# Altium PCB Game_Consol.PcbDoc
Units mil, origin at the board's own origin, x right, y up, seen from the top; angles counter-clockwise.
Board outline 3090.55 x 1732.28 mil, 2 copper layers (Top Layer, Bottom Layer); 55 components, 43 nets, 220 pads, 0 vias.
Unrouted connection lines stored in the file: 145.
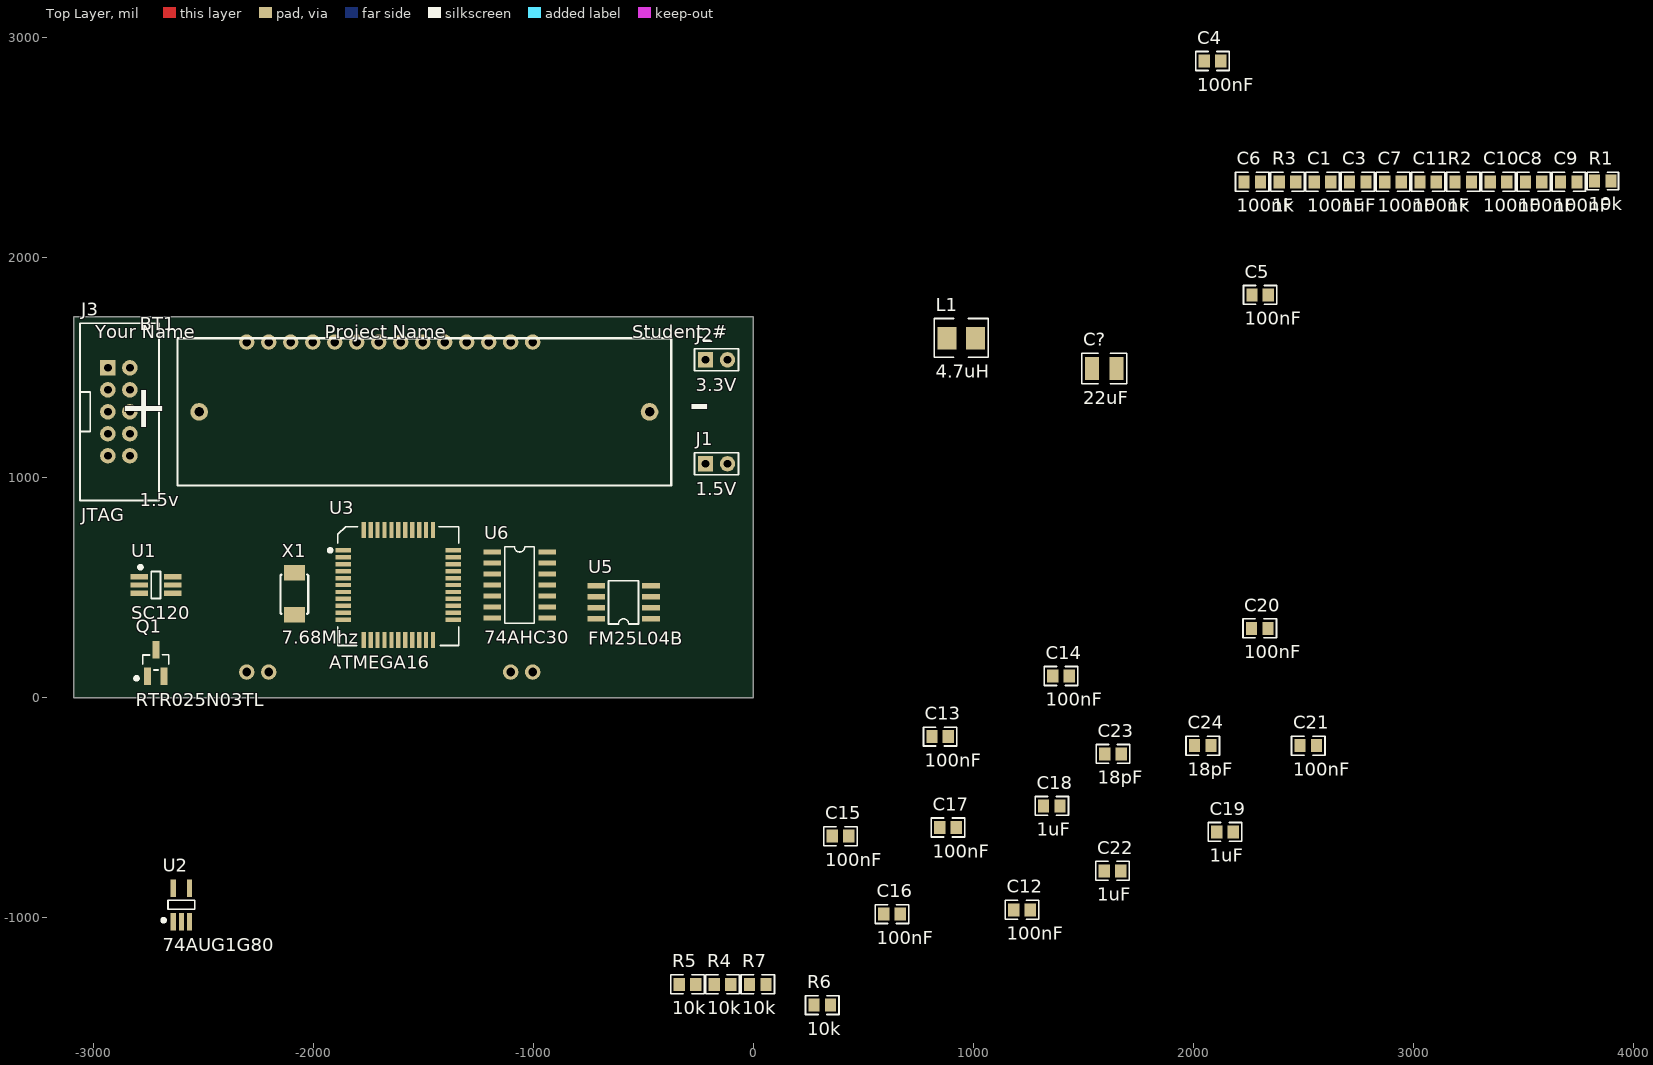
[diagram p0: Top Layer view]
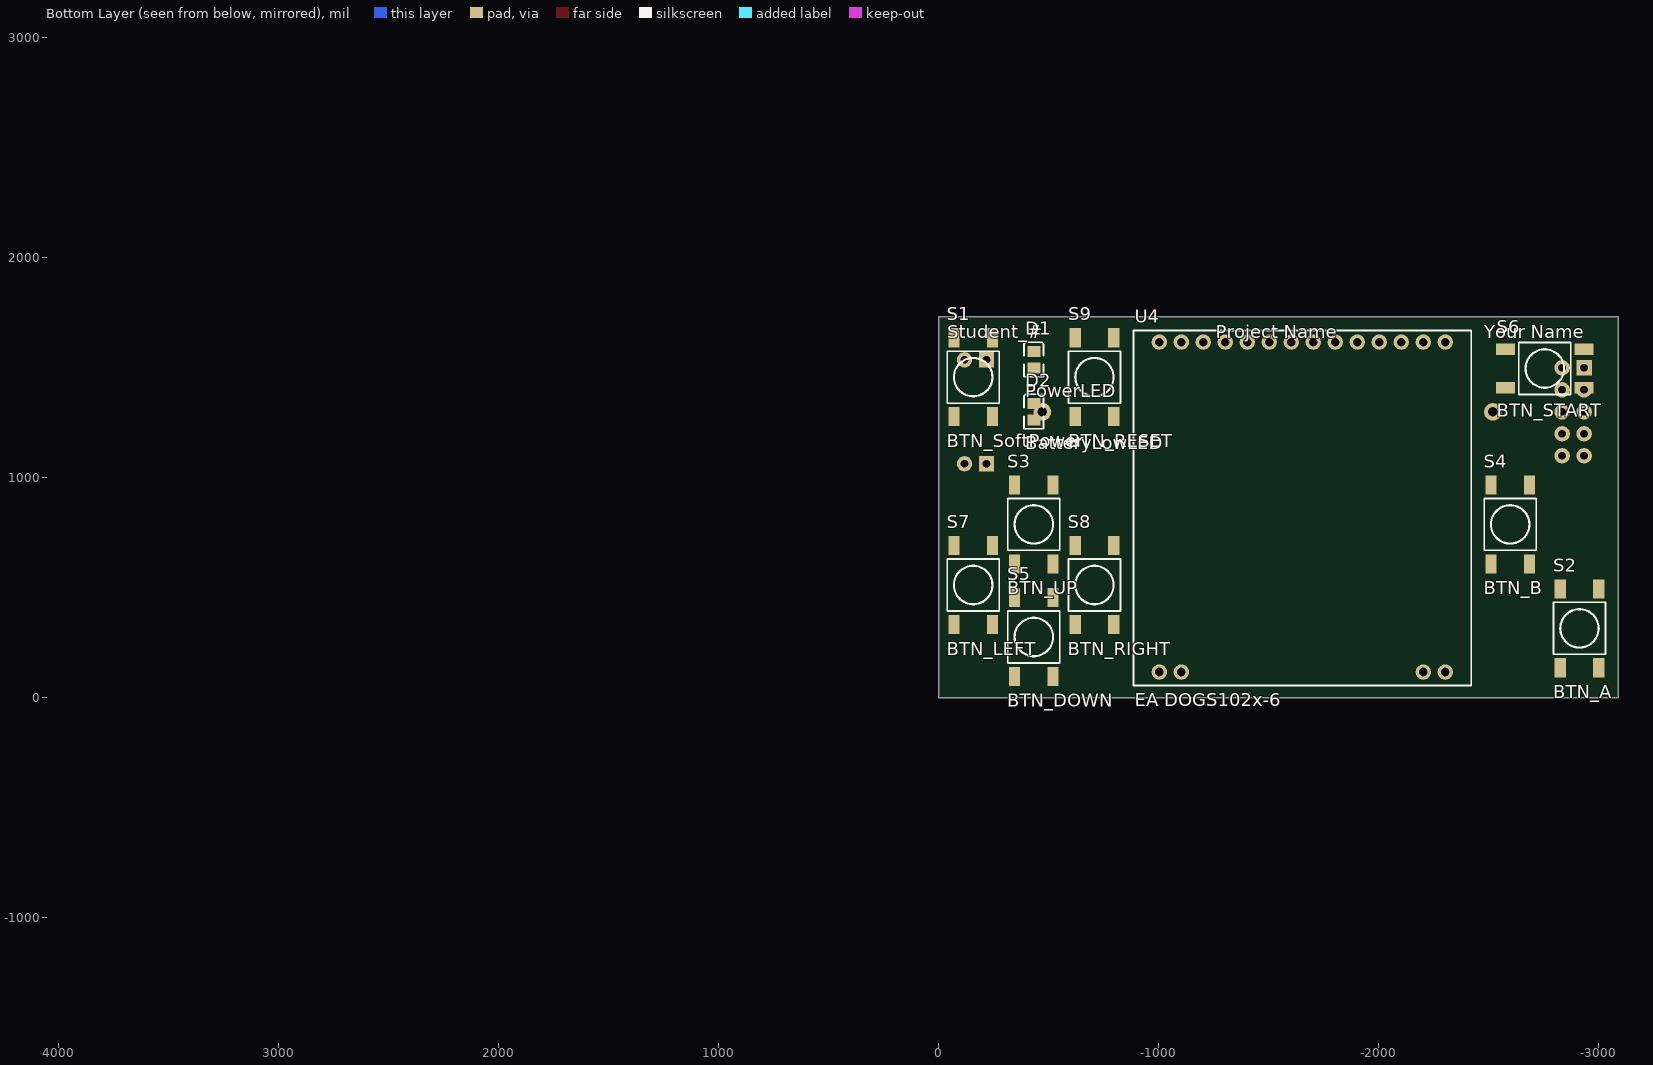
[diagram p1: Bottom Layer view, seen from below]

## Layer stack, top to bottom
Top Solder: solder mask 0.4, Solder Resist, Dk 3.5
Top Layer: signal copper 1.4
Dielectric1: dielectric 12.6, FR-4, Dk 4.8
Bottom Layer: signal copper 1.4
Bottom Solder: solder mask 0.4, Solder Resist, Dk 3.5

## Board outline
-3090.55,0 -3090.55,1732.28 0,1732.28 0,0

## Design rules (kind name [scope] priority, off if disabled: settings)
Clearance [All] p1: gap=10
ComponentClearance [All] p1 off: gap=10 collisioncheckmode=3 verticalgap=10 showdistances=FALSE
DiffPairsRouting [All] p1: maxlimit=20 minlimit=10 mostfreqgap=10 toplayer_minwidth=15 toplayer_maxwidth=15 toplayer_prefwidth=15 bottomlayer_minwidth=15 bottomlayer_maxwidth=15 bottomlayer_prefwidth=15 maxuncoupledlength=500
FabricationTestPointUsage TestPointUsage [All] p1: valid=0 allowmultiple=FALSE
FabricationTestpoint Testpoint [All] p1: side=3 testpointundercomponent=TRUE minsize=40 maxsize=100 preferedsize=60 minholesize=0 maxholesize=40 preferedholesize=32 testpointgrid=1 allowsidetop=TRUE allowsidebottom=TRUE usegrid=TRUE gridtolerance=0.01
Height [All] p1: minheight=0 maxheight=7874.02 prefheight=500
HoleSize [All] p1: absolutevalues=TRUE maxlimit=199 minlimit=15 maxpercent=80.000 minpercent=20.000
MinimumAnnularRing [All] p1: minimumring=5
PolygonConnect [All] p1: connectstyle=Relief reliefconductorwidth=10 reliefentries=4 polygonreliefangle="90 Angle" airgapwidth=10
RoutingVias [All] p1: holewidth=20 width=40 viastyle="Through Hole" minholewidth=15 minwidth=25 maxholewidth=80 maxwidth=100
SilkToSolderMaskClearance SilkscreenOverComponentPads [IsPad] p1: minsilkscreentomaskgap=10 clearancetoexposedcopper=TRUE
SolderMaskExpansion [All] p1: expansion=6
Width [All] p1: maxlimit=1000 minlimit=6 preferedwidth=10 minimp=50.000000 maximp=50.000000 favimp=50.000000
23 further rules are at their usual default settings.

## Classes and differential pairs
component class Game_Consol_Power: BT1 C1 C3 C4 C5 C6 C7 C8 C9 C10 C11 C? D1 D2 J1 J2 L1 R1 R2 R3 S1 U1 U2
component class Game_Consol_Top: C12 C13 C14 C15 C16 C17 C18 C19 C20 C21 C22 C23 C24 J3 Q1 R4 R5 R6 R7 S2 S3 S4 S5 S6 S7 S8 S9 U3 U4 U5 U6 X1

## Components (designator, comment, footprint, x,y, rotation, side; value= is the part's Value field where it differs from the comment)
BT1 "1.5v" BATT_HOLDER -1496.06,1299.21 r180 top
C1 "100nF" 0805 2587.09,2344.64 r0 top
C3 "1uF" 0805 2746.97,2344.64 r0 top
C4 "100nF" 0805 2086.61,2893.7 r0 top
C5 "100nF" 0805 2303.15,1830.71 r0 top
C6 "100nF" 0805 2267.34,2344.64 r0 top
C7 "100nF" 0805 2906.84,2344.64 r0 top
C8 "100nF" 0805 3546.34,2344.64 r0 top
C9 "100nF" 0805 3706.21,2344.64 r0 top
C10 "100nF" 0805 3386.46,2344.64 r0 top
C11 "100nF" 0805 3066.71,2344.64 r0 top
C12 "100nF" 0805 1220.47,-964.57 r0 top
C13 "100nF" 0805 848.43,-177.17 r0 top
C14 "100nF" 0805 1397.64,98.43 r0 top
C15 "100nF" 0805 395.67,-629.92 r0 top
C16 "100nF" 0805 629.92,-984.25 r0 top
C17 "100nF" 0805 883.86,-590.55 r0 top
C18 "1uF" 0805 1356.3,-492.13 r0 top
C19 "1uF" 0805 2143.7,-610.24 r0 top
C20 "100nF" 0805 2301.18,314.96 r0 top
C21 "100nF" 0805 2522.1,-218.65 r0 top
C22 "1uF" 0805 1631.89,-787.4 r0 top
C23 "18pF" 0805 1633.86,-255.91 r0 top
C24 "18pF" 0805 2042.48,-218.65 r0 top
C? "22uF" 1210 1594.49,1496.06 r0 top
D1 "PowerLED" 0805D -433.07,1535.43 r270 bottom
D2 "BatteryLowLED" 0805D -433.07,1299.21 r270 bottom
J1 "1.5V" HDR1X2 -218.11,1062.99 r0 top
J2 "3.3V" HDR1X2 -218.11,1535.43 r0 top
J3 "JTAG" BOXEDVERT10 -2934.65,1499.21 r270 top
L1 "4.7uH" 1210L 944.88,1633.86 r0 top
Q1 "RTR025N03TL" SOT23 -2716.54,157.48 r90 top
R1 "10k" 0805 3860.95,2348.27 r0 top
R2 "1k" 0805 3226.59,2344.64 r0 top
R3 "1k" 0805 2427.22,2344.64 r0 top
R4 "10k" 0805 -140.34,-1303.02 r0 top
R5 "10k" 0805 -300.22,-1303.02 r0 top
R6 "10k" 0805 312.99,-1397.64 r0 top
R7 "10k" 0805 19.53,-1303.02 r0 top
S1 "BTN_SoftPower" SPNO_SMD -157.48,1456.69 r270 bottom
S2 "BTN_A" SPNO_SMD -2913.39,314.96 r90 bottom
S3 "BTN_UP" SPNO_SMD -433.07,787.4 r90 bottom
S4 "BTN_B" SPNO_SMD -2598.43,787.4 r270 bottom
S5 "BTN_DOWN" SPNO_SMD -433.07,275.59 r270 bottom
S6 "BTN_START" SPNO_SMD -2755.91,1496.06 r0 bottom
S7 "BTN_LEFT" SPNO_SMD -157.48,511.81 r270 bottom
S8 "BTN_RIGHT" SPNO_SMD -708.66,511.81 r270 bottom
S9 "BTN_RESET" SPNO_SMD -708.66,1456.69 r270 bottom
U1 "SC120" SOT23-6 -2716.54,511.81 r0 top
U2 "74AUG1G80" SOT23-5 -2600.39,-942.07 r90 top
U3 "ATMEGA16" QFP-48 -1614.17,511.81 r0 top
U4 "EA DOGS102x-6" "EA DOGS102x" -1653.54,866.14 r180 bottom
U5 "FM25L04B" SOIC-8 -590.55,433.07 r180 top
U6 "74AHC30" SOIC-14 -1062.99,511.81 r0 top
X1 "7.68Mhz" XTAL_FLAT_SMD -2086.61,472.44 r90 top

## Footprints (in the part's own frame and the unit in brackets; to place one, negate y for a bottom-side part, rotate by r counter-clockwise, add the part's x,y. Pads: shape width x height; smd on the part's side, far side on the other; paste and mask are expansions set on the pad)
0805 [mm] "0805 Footprint"
  rect 1.3x1.5 smd: 1(-0.95,0) 2(0.95,0)
  silkscreen extent -1.93,-1.09 1.93,1.09, body extent -1.03,-0.64 0.97,0.61, height 0.8
0805D [mm] "0805 Diode"
  rect 1.3x1.5 smd: A(0.95,0) K(-0.95,0)
  silkscreen extent -2.03,-1.14 1.95,1.12, body extent -1.01,-0.62 1.01,0.63, height 1.1
1210 [mm]
  rect 1.6x2.7 smd: 1(-1.4,0) 2(1.4,0)
  silkscreen extent -2.6,-1.75 2.6,1.75, body extent -2,-1.24 2,1.24, height 1.72
1210L [mm] "Precision Wire Wound Inductor, 2-Leads, Body 3.2x3.2mm, IPC Low Density"
  rect 2.2x2.6 smd: 1(-1.651,0) 2(1.651,0)
  silkscreen extent -3.12,-2.21 3.1,2.26, body extent -1.75,-1.75 1.75,1.75, height 2.2
BATT_HOLDER [mil]
  round 80 hole 43.31: 1(1023.62,0) 2(-1023.62,0)
  silkscreen extent -1122,-335 1122,335
BOXEDVERT10 [mil] "IDC Header 2.54mm Boxed 10 pins"
  rect 70x70 hole 35.43: 1(0,0)
  round 70 hole 35.43: 2(0,100) 3(100,0) 4(100,100) 5(200,0) 6(200,100) 7(300,0) 8(300,100) 9(400,0) 10(400,100)
  silkscreen extent -203,-127 603,232, body extent -204,-129 604,237, height 359
"EA DOGS102x" [mil] "graphics display footprint"
  round 70 hole 39.37: 1(-650,-750) 2(-550,-750) 13(550,-750) 14(650,-750) 15(650,750) 16(550,750) 17(450,750) 18(350,750) 19(250,750) 20(150,750) 21(50,750) 22(-50,750) 23(-150,750) 24(-250,750) 25(-350,750) 26(-450,750) 27(-550,750) 28(-650,750)
  silkscreen extent -768,-811 768,803, body extent -768,-807 768,807, height 213
HDR1X2 [mil] "Connector; Header; 2 Position"
  rect 70x70 hole 35.43: 1(0,0)
  round 70 hole 35.43: 2(100,0)
  silkscreen extent -50,-50 150,50, body extent -50,-50 150,50, height 333
QFP-48 [mm]
  rect 1.8x0.5 smd: 1(-6.35,4) 2(-6.35,3.2) 3(-6.35,2.4) 4(-6.35,1.6) 5(-6.35,0.8) 6(-6.35,0) 7(-6.35,-0.8) 8(-6.35,-1.6) 9(-6.35,-2.4) 10(-6.35,-3.2) 11(-6.35,-4) 23(6.35,-4) 24(6.35,-3.2) 25(6.35,-2.4) 26(6.35,-1.6) 27(6.35,-0.8) 28(6.35,0) 29(6.35,0.8) 30(6.35,1.6) 31(6.35,2.4) 32(6.35,3.2) 33(6.35,4)
  rect 0.5x1.8 smd: 12(-4,-6.35) 13(-3.2,-6.35) 14(-2.4,-6.35) 15(-1.6,-6.35) 16(-0.8,-6.35) 17(0,-6.35) 18(0.8,-6.35) 19(1.6,-6.35) 20(2.4,-6.35) 21(3.2,-6.35) 22(4,-6.35) 34(4,6.35) 35(3.2,6.35) 36(2.4,6.35) 37(1.6,6.35) 38(0.8,6.35) 39(0,6.35) 40(-0.8,6.35) 41(-1.6,6.35) 42(-2.4,6.35) 43(-3.2,6.35) 44(-4,6.35)
  silkscreen extent -8,-6.98 6.98,6.73, body extent -5.97,-6 6.03,6, height 1.13
SOIC-8 [mil] "SOIC-8 Footprint"
  rect 80x24 smd: 1(-125,75) 2(-125,25) 3(-125,-25) 4(-125,-75) 5(125,-75) 6(125,-25) 7(125,25) 8(125,75)
  silkscreen extent -68,-98 68,98, body extent -117,-98 119,94, height 67
SOIC-14 [mil] "SOIC-14 Footprint"
  rect 80x24 smd: 1(-125,150) 2(-125,100) 3(-125,50) 4(-125,0) 5(-125,-50) 6(-125,-100) 7(-125,-150)
  rect 80x24.02 smd: 8(125,-150) 9(125,-100) 10(125,-50) 11(125,0) 12(125,50) 13(125,100) 14(125,150)
  silkscreen extent -67,-173 66,173, body extent -118,-170 118,170, height 61
SOT23 [mil] "SOT23, 3-Leads, Body 3.0x2.5mm (max), Pitch 0.95mm, IPC Low Density"
  rect 80.24x31.5 smd: 1(-60,37.4)
  rect 80x31.5 smd: 2(-60,-37.4) 3(60,0)
  silkscreen extent -75,-59 37,93, body extent -52,-59 52,59, height 43
SOT23-5 [mm]
  rect 2.032x0.6 smd: 1(-1.929,0.95) 2(-1.929,0) 3(-1.929,-0.95) 4(1.929,-0.95) 5(1.929,0.95)
  silkscreen extent -1.9,-1.55 0.53,2.18, body extent -1.17,-1.46 1.17,1.46, height 1.02
SOT23-6 [mm]
  rect 2.032x0.6 smd: 1(-1.929,0.95) 2(-1.929,0) 3(-1.929,-0.95) 4(1.929,-0.95) 5(1.929,0) 6(1.929,0.95)
  silkscreen extent -1.9,-1.55 0.53,2.18, body extent -1.5,-1.56 1.5,1.49, height 1.42
SPNO_SMD [mm] "SP NO SMD Tactile switch"
  rect 2.2x1.3 smd: 1(-4.55,-2.225) 2(4.55,-2.225) 3(-4.55,2.225) 4(4.55,2.225)
  silkscreen extent -3,-3 3,3, body extent -4.25,-3.3 4.25,3.3, height 4.32
XTAL_FLAT_SMD [mm]
  rect 1.8x2.4 smd: 1(-2.412,0) 2(2.413,0)
  silkscreen extent -2.33,-1.59 2.21,1.6, body extent -2.58,-1.6 2.42,1.6, height 1.02

## Part data
BT1: library part BAT, "Battery Holder AA 1.5v"
C1 C3 C4 C5 C6 C7 C8 C9 C10 C11 C12 C13 C14 C15 C16 C17 C18 C19 C20 C21 C22 C23 C24: library part "C 0805", "Capacitor 100nF"
C?: library part "C 1210", "Capacitor 22uF"
D1: library part "LED GREEN", "Light Emitting Diode"
D2: library part "LED RED", "Light Emitting Diode"
J1 J2: library part HDR2, "2 Pin Header"
J3: library part JTAG_CON, "JTAG ATMEL connector"
L1: library part "I 1210", "Inductor 4.7uH"
Q1: library part MOSFET-N, "N-Channel MOSFET"
R1 R2 R3 R4 R5 R6 R7: library part R, "Resistor"
S1 S2 S3 S4 S5 S6 S7 S8 S9: library part SW-PB, "Push Button Switch"
U1: "Regulator Low Voltage"
U2: "Inverted single D flip flop"
U3: "ATMEGA16 Microcontroller"
U4: "LCD 102x64-pixel with backlight"
U5: "FRAM 4Kb Memory"
U6: "1 x 8 Input NAND gate"
X1: library part XTAL, "Crystal Oscillator"

## Nets (pads, with @x,y where several pads share a name; then routed paths per layer and width w, separated by ;. In a path a pad name is that pad's centre, name@x,y a point inside that pad or via, vN(x,y) a via of type N, cw(c..) or ccw(c..) an arc to the next point about the centre after c; other vN are vias at no path point)
BATTERYLOWLED: D2.K U3.40
BTN_A: C12.1 S2.3 U3.26 U6.1
BTN_B: C14.1 S4.3 U3.20 U6.2
BTN_DOWN: C15.1 S5.3 U3.32 U6.4
BTN_LEFT: C17.1 S7.3 U3.31 U6.5
BTN_RESET: C21.1 R4.1 S9.3 U3.4
BTN_RIGHT: C20.1 S8.3 U3.30 U6.6
BTN_START: C16.1 S6.3 U3.16 U6.11 U6.12
BTN_UP: C13.1 S3.3 U3.33 U6.3
GND: BT1.2 C1.2 C3.1 C4.2 C5.1 C6.1 C7.1 C8.1 C9.1 C10.1 C11.1 C12.2 C13.2 C14.2 C15.2 C16.2 C17.2 C20.2 C21.2 C22.2 C23.1 C24.1 C?.2 D1.K J1.1 J2.1 J3.2 J3.10 Q1.2 S1.2 S2.2 S3.2 S4.2 S5.2 S6.2 S7.2 S8.2 S9.2 U1.2 U1.5 U2.3 U3.6 U3.18 U3.28 U3.39 U4.20 U4.21 U5.4 U6.7
LCD_CD: U3.34 U4.26
LCD_CS: U3.35 U4.28
LCD_PWM: R6.1 U3.43
LCD_RESET: U3.41 U4.27
MC_MISO: U3.2 U5.2
MC_MOSI: U3.1 U4.24 U5.5
MC_SCK: U3.3 U4.25 U5.6
NAND_Y': U3.12 U6.8
NetC1_1: C1.1 R1.1 S1.3 U2.2
NetC18_1: C18.1 U4.16
NetC18_2: C18.2 U4.19
NetC19_1: C19.1 U4.18
NetC19_2: C19.2 U4.17
NetC22_1: C22.1 U4.15
NetC23_2: C23.2 U3.7 X1.1
NetC24_2: C24.2 U3.8 X1.2
NetD1_A: D1.A R2.1
NetD2_A: D2.A R3.2
NetL1_1: L1.1 U1.3
NetQ1_1: Q1.1 R6.2
NetQ1_3: Q1.3 U4.2 U4.13
NetR5_2: R5.2 U4.1
NetR7_2: R7.2 U4.14
RAM_CS: U3.13 U5.1
RAM_HOLD: U3.15 U5.7
RAM_WP: U3.14 U5.3
"SOFT POWER": U1.6 U2.1 U2.4
TCK: J3.1 U3.21
TDI: J3.9 U3.24
TDO: J3.3 U3.23
TMS: J3.5 U3.22
VBATT: BT1.1 C3.2 C4.1 J1.2 L1.2 R1.2 U1.1 U2.5 U3.36
VCC: C5.2 C6.2 C7.2 C8.2 C9.2 C10.2 C11.2 C?.1 J2.2 J3.4 J3.7 R2.2 R3.1 R4.2 R5.1 R7.1 U1.4 U3.5 U3.17 U3.27 U3.38 U4.22 U4.23 U5.8 U6.14
pads on no net: J3.6 J3.8 S1.1 S1.4 S2.1 S2.4 S3.1 S3.4 S4.1 S4.4 S5.1 S5.4 S6.1 S6.4 S7.1 S7.4 S8.1 S8.4 S9.1 S9.4 U3.9 U3.10 U3.11 U3.19 U3.25 U3.29 U3.37 U3.42 U3.44 U6.9 U6.10 U6.13

## Silkscreen, mask and mechanical layers (free items; w line width, h text height)
Top Overlay:
  text "Your Name" at -2992.13,1633.86 h60
  text "Project Name" at -1948.82,1633.86 h60
  text "Student_#" at -551.18,1633.86 h60
Bottom Overlay:
  text "Your Name" at -2480.31,1633.86 h60
  text "Project Name" at -1259.84,1633.86 h60
  text "Student_#" at -39.37,1633.86 h60
Mechanical 1:
  the board outline again, w10

## Text inside footprints (layer, text, board x,y; h text height)
BT1: Top Overlay "-" at -196.85,1397.64 h196.85 r180; Top Overlay "+" at -2657.48,1397.64 h196.85 r180